# EAGLE board CANNode (EAGLE 7.4.0)
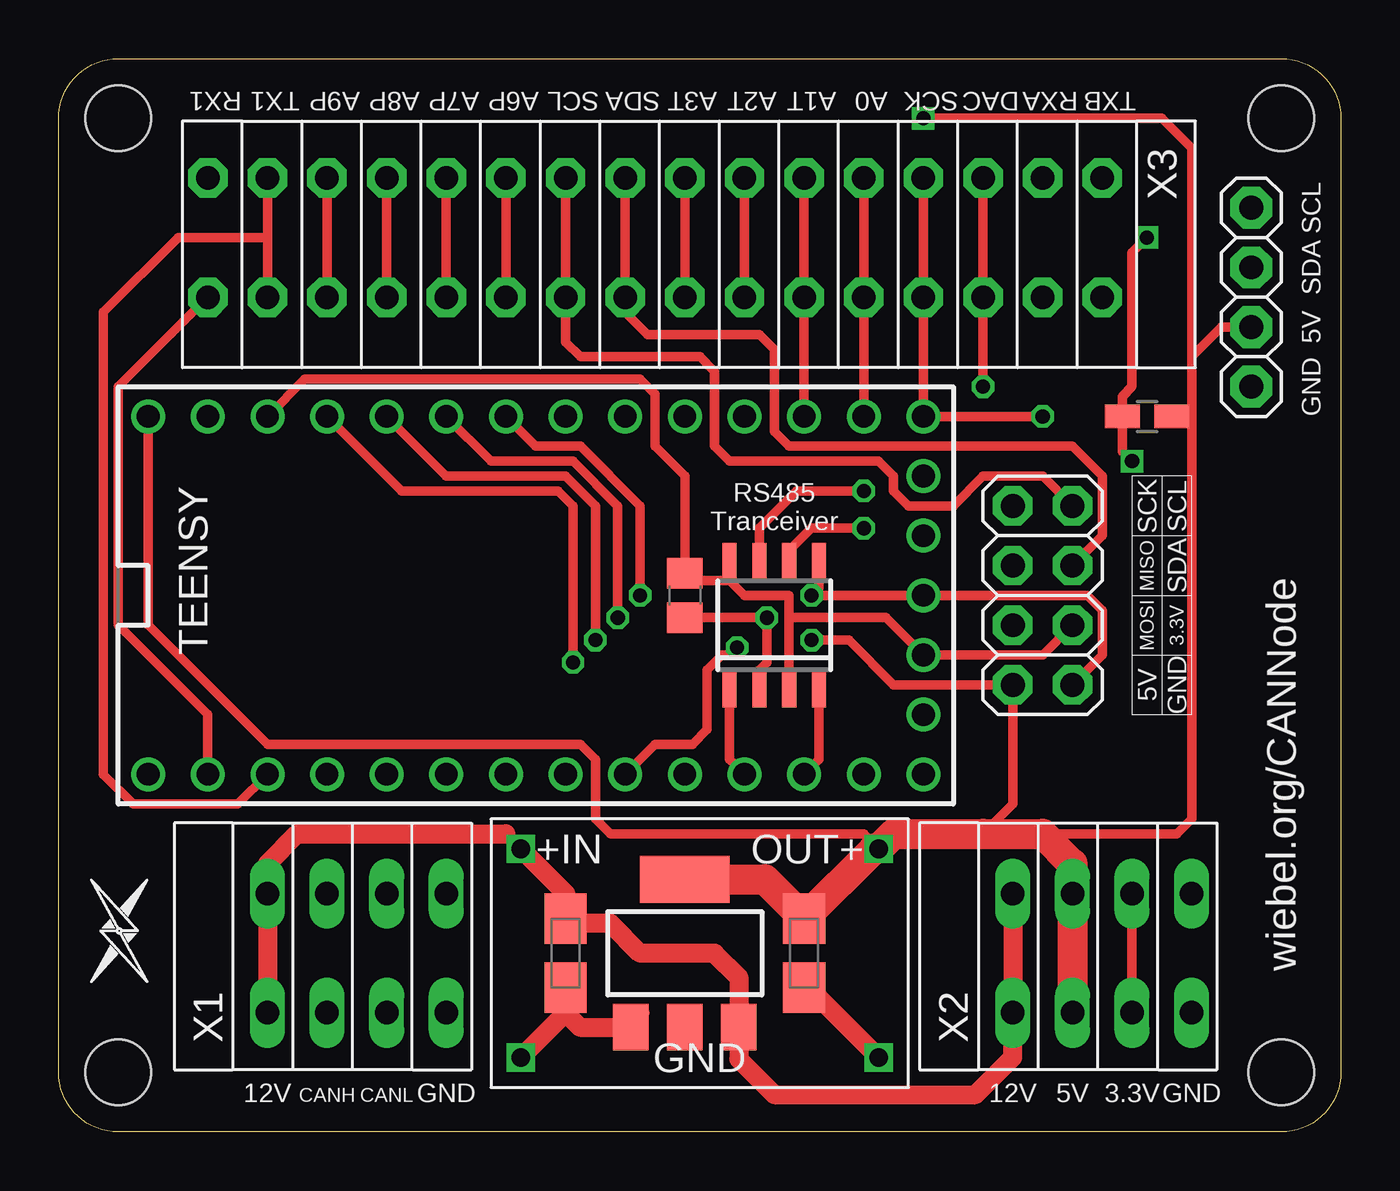
[diagram p0: board, top side]
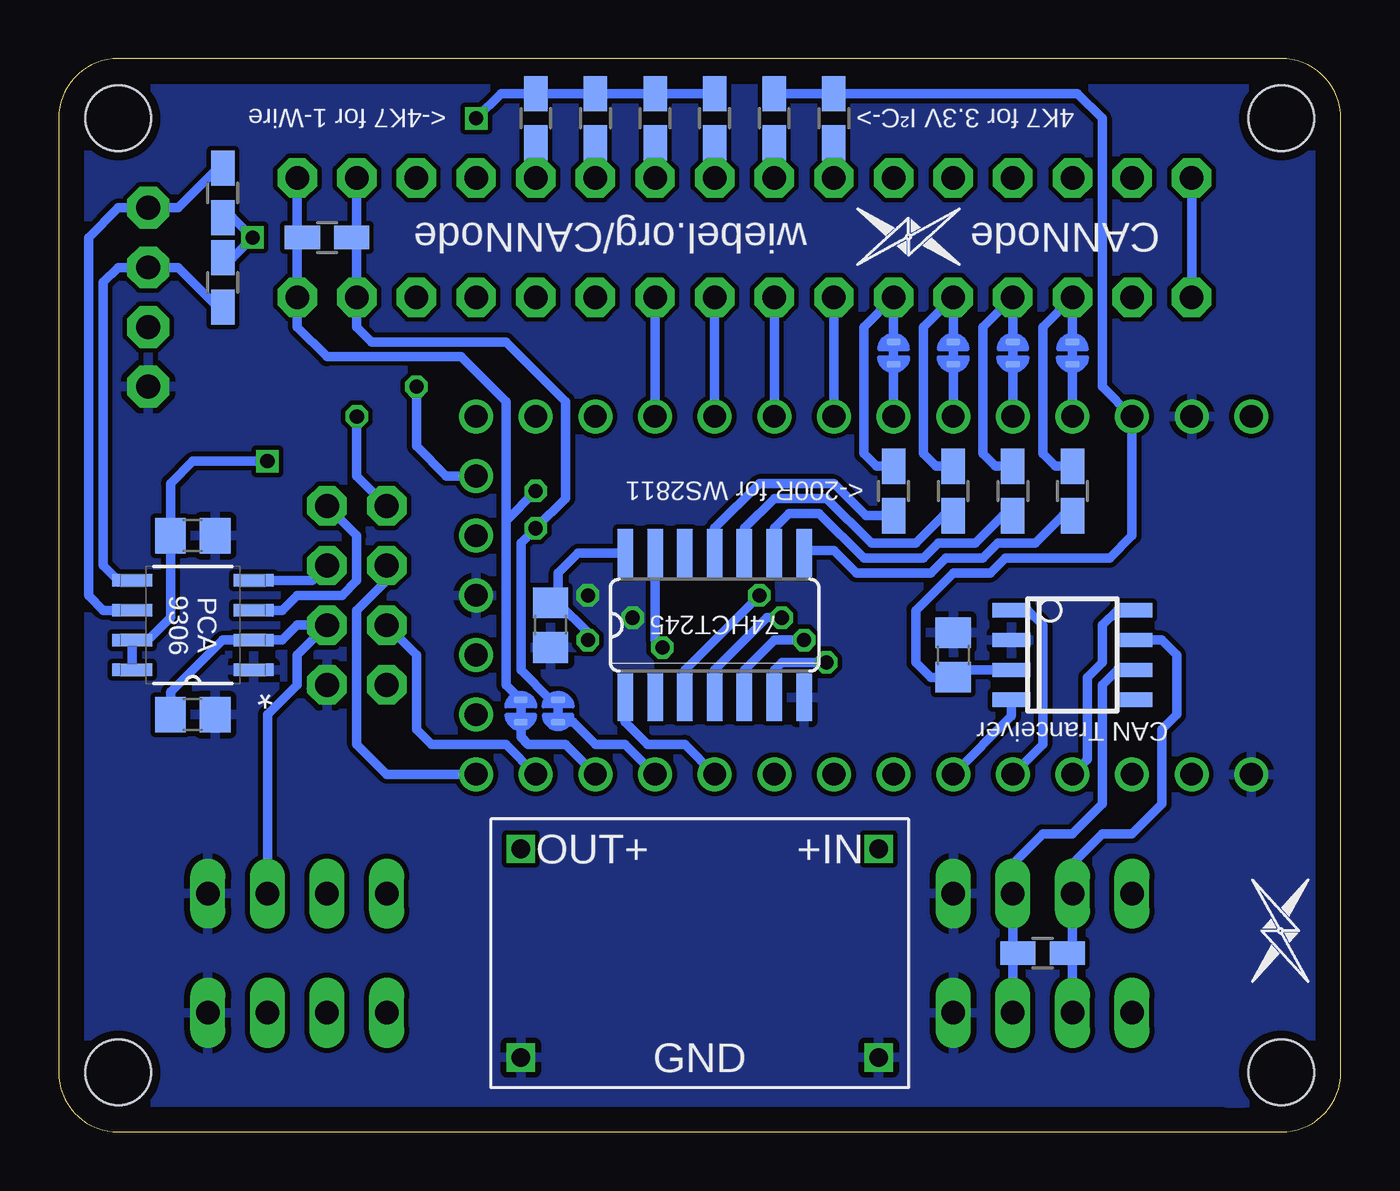
[diagram p1: board, bottom side, seen from below]

Size 54.61 x 45.72 mm. Coordinates in mm from the lower left corner, seen from the top.
Outline: 2.54,45.72 52.07,45.72 arc-90 54.61,43.18 54.61,2.54 arc-90 52.07,0 2.54,0 arc-90 0,2.54 0,43.18 arc-90 2.54,45.72
Copper layers (1*16): Top 0.0356mm / dielectric 1.5011mm / Bottom 0.0356mm
Design rules "oshpark-2layer *": minimum track width 6mil, minimum drill 13mil, track to track 6mil, track to pad 6mil, pad to pad 6mil, via to via 6mil, smd to smd 6mil, copper to edge 15mil, drill to drill 6mil, minimum pad ring 7mil, minimum via ring 7mil, stop-mask expansion 4mil, vias tented up to drill 0mil, thermal gap 10mil
Net classes: 0 default: clearance 0.205 mm
Holes 2.8 mm at 2.54,43.18 52.07,43.18 52.07,2.54 2.54,2.54

## Footprints (pad centres in the part's own frame; a part is rotated, then mirrored left to right if it is on the bottom)
C0805 = smd 1.3 x 1.5: 1 -0.95,0; 2 0.95,0
A/3216-18W = smd 2.15 x 1.8: + 1.475,0; - -1.475,0
SOT223 = smd 1.5 x 2: 1 -2.3,-3.15; 2 0,-3.15; 3 2.3,-3.15 | smd 3.8 x 2: 4 0,3.15
SO8 = smd 0.6 x 1.6: 1 -1.905,-2.6; 2 -0.635,-2.6; 3 0.635,-2.6; 4 1.905,-2.6; 5 1.905,2.6; 6 0.635,2.6; 7 -0.635,2.6; 8 -1.905,2.6
SO14 = smd 0.66 x 2.032: 1 -3.81,-3.073; 2 -2.54,-3.073; 3 -1.27,-3.073; 4 0,-3.073; 5 1.27,-3.073; 6 2.54,-3.073; 7 3.81,-3.073; 8 3.81,3.073; 9 2.54,3.073; 10 1.27,3.073; 11 0,3.073; 12 -1.27,3.073; 13 -2.54,3.073; 14 -3.81,3.073
D_R-PDSO-G8 = smd 0.6 x 1.5: 1 -1.905,-2.75; 2 -0.635,-2.75; 3 0.635,-2.75; 4 1.905,-2.75; 5 1.905,2.75; 6 0.635,2.75; 7 -0.635,2.75; 8 -1.905,2.75
2X04 = drill 1.016 pad 1.676 octagon: 1 -3.81,-1.27; 2 -3.81,1.27; 3 -1.27,-1.27; 4 -1.27,1.27; 5 1.27,-1.27; 6 1.27,1.27; 7 3.81,-1.27; 8 3.81,1.27
1X04 = drill 1.016 pad 1.778 octagon: 1 -3.81,0; 2 -1.27,0; 3 1.27,0; 4 3.81,0
DC-DC = drill 0.8 square: IN+ -15.875,9.525; IN- -15.875,0.635; OUT+ -0.635,9.525; OUT- -0.635,0.635
R0805W = smd 1.5 x 1: 1 -1.052,0; 2 1.052,0
TEENSY3-OUTER_ROW = drill 0.965: 0 -7.62,13.97; 1 -7.62,11.43; 2 -7.62,8.89; 3 -7.62,6.35; 3.3V 7.62,11.43; 3.3V1 -2.54,-16.51; 4 -7.62,3.81; 5 -7.62,1.27; 6 -7.62,-1.27; 7 -7.62,-3.81; 8 -7.62,-6.35; 9 -7.62,-8.89; 10 -7.62,-11.43; 11 -7.62,-13.97; 12 -7.62,-16.51; 13 7.62,-16.51; 14/A0 7.62,-13.97; 15/A1 7.62,-11.43; 16/A2 7.62,-8.89; 17/A3 7.62,-6.35; 18/A4 7.62,-3.81; 19/A5 7.62,-1.27; 20/A6 7.62,1.27; 21/A7 7.62,3.81; 22/A8 7.62,6.35; 23/A9 7.62,8.89; AGND 7.62,13.97; GND -7.62,16.51; GND1 0,-16.51; PGM 2.54,-16.51; RESET/DAC 5.08,-16.51; VBAT -5.08,-16.51; VIN 7.62,16.51
SOIC127P600X175-8N = smd 1.702 x 0.533: 1 -2.591,1.905; 2 -2.591,0.635; 3 -2.591,-0.635; 4 -2.591,-1.905; 5 2.591,-1.905; 6 2.591,-0.635; 7 2.591,0.635; 8 2.591,1.905
2-WAY_BRIDGE = smd 0.61 x 0.305: A 0,0.953; B 0,0
KF141V-P4 = drill 1 long: P$101 -7.62,0; P$102 -5.08,0; P$103 -2.54,0; P$104 0,0; P$201 -7.62,5.08; P$202 -5.08,5.08; P$203 -2.54,5.08; P$204 0,5.08
KF141V-P16 = drill 1 pad 1.676 octagon: P$101 -38.1,0; P$102 -35.56,0; P$103 -33.02,0; P$104 -30.48,0; P$105 -27.94,0; P$106 -25.4,0; P$107 -22.86,0; P$108 -20.32,0; P$109 -17.78,0; P$110 -15.24,0; P$111 -12.7,0; P$112 -10.16,0; P$113 -7.62,0; P$114 -5.08,0; P$115 -2.54,0; P$116 0,0; P$201 -38.1,5.08; P$202 -35.56,5.08; P$203 -33.02,5.08; P$204 -30.48,5.08; P$205 -27.94,5.08; P$206 -25.4,5.08; P$207 -22.86,5.08; P$208 -20.32,5.08; P$209 -17.78,5.08; P$210 -15.24,5.08; P$211 -12.7,5.08; P$212 -10.16,5.08; P$213 -7.62,5.08; P$214 -5.08,5.08; P$215 -2.54,5.08; P$216 0,5.08

## Placement (x,y rotation side)
C1  100n  [C0805]  16.51,20.32 270 bottom
C2  [A/3216-18W]  21.59,7.62 90 top
C3  [A/3216-18W]  31.75,7.62 90 top
C4  100n  [C0805]  33.66,21.59 90 bottom
C5  100n  [C0805]  48.9,25.4 180 bottom
C6  100n  [C0805]  48.9,17.78 180 bottom
C7  100n  [C0805]  26.67,22.86 90 top
IC1  LM117  [SOT223]  26.67,7.62 0 top
IC2  PCA82C250T  [SO8]  11.43,20.32 270 bottom
IC3  74HCT243D  [SO14]  26.67,21.59 0 bottom
IC4  75176AD  [D_R-PDSO-G8]  30.48,21.59 0 top
JP1  [2X04]  41.91,22.86 90 top
JP3  [1X04]  50.8,35.56 90 top
MOD1  DCDC  [DC-DC]  35.56,2.54 0 top
R1  [R0805W]  12.7,7.62 0 bottom
R2  200k  [R0805W]  46.35,30.48 0 top
R3  [R0805W]  47.62,36.2 90 bottom
R4  [R0805W]  47.62,40.01 270 bottom
R5  [R0805W]  43.18,38.1 0 bottom
R6  [R0805W]  34.29,43.18 270 bottom
R7  [R0805W]  31.75,43.18 270 bottom
R8  [R0805W]  29.21,43.18 270 bottom
R9  [R0805W]  26.67,43.18 270 bottom
R10  [R0805W]  11.43,27.3 270 bottom
R11  [R0805W]  13.97,27.3 270 bottom
R12  [R0805W]  16.51,27.3 270 bottom
R13  [R0805W]  19.05,27.3 270 bottom
R14  [R0805W]  24.13,43.18 90 bottom
R15  [R0805W]  21.59,43.18 90 bottom
TEENSY  TEENSY_3.1_OUTER_ROW  [TEENSY3-OUTER_ROW]  20.32,22.86 90 top
U1  PCA9306D,118  [SOIC127P600X175-8N]  48.9,21.59 180 bottom
U$1  [LOGO_MID]  3.81,6.35 90 top
U$2  2-WAY_BRIDGE  [2-WAY_BRIDGE]  19.05,33.66 180 bottom
U$3  2-WAY_BRIDGE  [2-WAY_BRIDGE]  16.51,33.66 180 bottom
U$4  2-WAY_BRIDGE  [2-WAY_BRIDGE]  13.97,33.66 180 bottom
U$5  2-WAY_BRIDGE  [2-WAY_BRIDGE]  11.43,33.66 180 bottom
U$6  [LOGO_MID]  16.19,39.37 180 bottom
U$7  [LOGO_MID]  3.81,10.79 270 bottom
U$14  2-WAY_BRIDGE  [2-WAY_BRIDGE]  34.92,17.46 0 bottom
U$15  2-WAY_BRIDGE  [2-WAY_BRIDGE]  33.34,17.46 0 bottom
X1  KF141-P4  [KF141V-P4]  16.51,5.08 0 top
X2  KF141-P4  [KF141V-P4]  48.26,5.08 0 top
X3  KF141-P16  [KF141V-P16]  6.35,40.64 180 top

## Library data of the parts
C1-C7 R10 = rcl
IC1 = v-reg
IC2 = micro-philips_own; OC_FARNELL: 1085275; OC_NEWARK: unknown
IC3 = 74xx-eu
IC4 = 751xx
JP1 = adafruit
JP3 = own_pinhead
MOD1 U$1-U$7 U$14 U$15 X1 X2 = own
R1-R9 R11-R15 = resistor
TEENSY = Teensy_3_and_LC_Series_Boards_v1.0
U1 = PCA9306D_118; MPN: PCA9306D,118; OC_FARNELL: 1831194; OC_NEWARK: 70R6428; PACKAGE: SOIC-8; SUPPLIER: NXP
X3 = own_002

## Nets
+3V3: C1.2 C6.2 C7.2 IC2.3 IC4.3 IC4.8 JP1.3 R14.2 R15.2 TEENSY.3.3V TEENSY.3.3V1 U1.2 X2.P$103 X2.P$203
+5V: C3.+ C4.2 IC1.4 IC3.14 JP1.2 JP3.2 MOD1.OUT+ R2.2 R6.1 R7.1 R8.1 R9.1 TEENSY.VIN X2.P$102 X2.P$202
+12V: C2.+ IC1.3 MOD1.IN+ X1.P$101 X1.P$201 X2.P$101 X2.P$201
A14: TEENSY.RESET/DAC X3.P$103 X3.P$203
GND: C1.1 C2.- C3.- C4.1 C5.1 C6.1 C7.1 IC1.1 IC2.2 IC3.7 IC4.2 IC4.5 JP1.1 JP3.1 MOD1.IN- MOD1.OUT- TEENSY.AGND TEENSY.GND TEENSY.GND1 U1.1 X1.P$104 X1.P$204 X2.P$104 X2.P$204
MISO: JP1.6 TEENSY.12
MOSI: JP1.4 TEENSY.11
N$1: IC2.1 TEENSY.3
N$2: IC2.4 TEENSY.4
N$3: IC2.7 R1.2 X1.P$102 X1.P$202
N$4: IC3.8 R10.2
N$5: IC3.9 R11.2
N$6: R12.1 U$3.B X3.P$112 X3.P$212
N$9: IC3.3 R13.1 TEENSY.20/A6 U$2.A U$2.B X3.P$111 X3.P$211
N$10: IC3.10 R12.2
N$11: IC2.8 TEENSY.2
N$12: C5.2 R2.1 R3.2 R4.2 U1.7 U1.8
N$13: R9.2 TEENSY.17/A3 X3.P$108 X3.P$208
N$14: R8.2 TEENSY.16/A2 X3.P$107 X3.P$207
N$15: R7.2 TEENSY.15/A1 X3.P$106 X3.P$206
N$16: R6.2 TEENSY.14/A0 X3.P$105 X3.P$205
N$17: R10.1 U$5.B X3.P$114 X3.P$214
N$18: IC3.5 R11.1 TEENSY.22/A8 U$4.A U$4.B X3.P$113 X3.P$213
N$19: IC3.4 TEENSY.21/A7 U$3.A
N$20: IC2.6 R1.1 X1.P$103 X1.P$203
N$21: IC3.11 R13.2
N$25: IC3.6 TEENSY.23/A9 U$5.A
RX1: TEENSY.0 X3.P$116 X3.P$216
RX2: IC4.1 IC4.6 R5.2 TEENSY.9 U$15.A U$15.B X3.P$102 X3.P$202
RX3: IC3.13 TEENSY.7
SCK: JP1.8 TEENSY.13 X3.P$104 X3.P$204
SCL0: JP1.7 R15.1 TEENSY.19/A5 U1.3 X3.P$110 X3.P$210
SCL_5V: JP3.4 R4.1 U1.6
SDA0: JP1.5 R14.1 TEENSY.18/A4 U1.4 X3.P$109 X3.P$209
SDA_5V: JP3.3 R3.1 U1.5
TX1: TEENSY.1 X3.P$115 X3.P$215
TX2: IC4.4 IC4.7 R5.1 TEENSY.10 U$14.A U$14.B X3.P$101 X3.P$201
TX3: IC3.1 TEENSY.8
VBAT: TEENSY.VBAT

## Tracks (layer width: path | path; a pad name or v marks a point on that pad's centre or on a via)
+3V3
  Top 0.406: X2.P$103 X2.P$203 45.72,11.43 | 31.11,21.91 35.24,21.91 TEENSY.3.3V1 41.91,20.32 JP1.3 | 28.57,23.5 IC4.8 | IC4.3 31.11,21.91 | 31.11,21.91 31.11,22.86 29.21,22.86 28.57,23.5 | 28.57,23.5 26.98,23.5 C7.2 26.67,27.94 25.4,29.21 25.4,31.43 24.77,32.07 10.48,32.07 TEENSY.3.3V
  Bottom 0.406: IC2.3 16.2,19.68 C1.2 17.46,19.37 17.47,19.37 18.1,20 18.1,22.23 16.51,23.81 14.92,23.81 14.29,24.45 9.84,24.45 8.89,25.4 TEENSY.3.3V 10.16,31.75 10.16,43.18 11.21,44.23 R15.2 R14.2 | X2.P$203 45.72,17.78 44.45,19.05 44.45,20.32 JP1.3 44.45,21.59 45.09,20.95 U1.2 47.62,20.95 49.84,18.73 C6.2
+5V  (via drill 0.6)
  Top 0.406: TEENSY.VIN 3.81,21.59 8.89,16.51 22.23,16.51 22.86,15.88 22.86,13.34 23.5,12.7 34.29,12.7 MOD1.OUT+ | X2.P$102 X2.P$202 43.18,11.43 | C3.+ 31.95,9.1 | JP3.2 49.53,34.29 48.26,33.02 | 48.26,33.02 48.26,30.48 | 48.26,30.48 48.26,13.34 47.62,12.7 41.91,12.7 | R2.2 48.26,30.48 | 39.37,12.7 40.64,13.97 JP1.2 35.56,19.05 33.66,20.95 v32.07,20.95 | 48.26,33.02 48.26,41.91 46.99,43.18 v36.83,43.18
  Top 0.813: MOD1.OUT+ 34.72,12.06
  Top 1.27: IC1.4 30.07,10.77 C3.+ 34.72,12.06 | MOD1.OUT+ 35.56,12.7 39.37,12.7 41.91,12.7 43.18,11.43 X2.P$102
  Bottom 0.406: 30.9,24.66 IC3.14 32.49,24.66 33.34,23.82 33.34,22.54 | C4.2 33.34,22.54 | 33.34,22.54 32.07,21.27 v32.07,20.95 | 26.89,44.45 R9.1 R8.1 R7.1 R6.1 35.78,44.23 v36.83,43.18
+12V
  Top 0.406: 21.59,10.16 C2.+ | X1.P$201 8.89,11.43 | IC1.3 28.97,4.05 | 19.05,12.7 MOD1.IN+
  Top 0.813: X1.P$201 X1.P$101 | MOD1.IN+ 21.59,10.16 | IC1.3 28.97,6.59 27.94,7.62 24.77,7.62 23.5,8.89 21.8,8.89 C2.+ | X2.P$201 X2.P$101 40.64,3.17 39.05,1.59 30.48,1.59 28.97,3.1 28.97,4.05 | 8.89,11.43 10.16,12.7 19.05,12.7
A14  (via drill 0.6)
  Top 0.406: X3.P$103 X3.P$203 v39.37,31.75
  Bottom 0.406: TEENSY.RESET/DAC 38.1,27.94 39.37,29.21 v39.37,31.75
GND  (via drill 0.6)
  Top 0.406: 21.59,5.08 C2.- | IC1.1 24.98,5.08 | C3.- 31.95,6.14 | IC4.5 32.38,23.18 v32.07,22.86 TEENSY.GND1 43.81,22.86 44.45,22.23 44.45,20.32 JP1.1 | IC4.2 29.84,19.68 30.16,20 v30.16,21.91 C7.1
  Top 0.813: MOD1.IN- 21.59,5.08 22.2,4.47 IC1.1 | 31.95,6.14 MOD1.OUT-
  pour Bottom: 3.81,44.45 50.8,44.45 arc-90 53.34,41.91 53.34,3.81 arc-90 52.07,1.27 5.08,1.27 arc-90 1.27,3.81 1.27,41.91 arc-90
MISO
  Bottom 0.406: TEENSY.12 40.64,15.24 41.91,16.51 41.91,22.23 40.64,23.5 JP1.6
MOSI
  Bottom 0.406: TEENSY.11 35.56,16.51 38.73,16.51 39.37,17.14 39.37,20.32 JP1.4
N$1
  Bottom 0.406: IC2.1 13.34,22.23 12.7,21.59 12.7,16.51 TEENSY.3
N$2
  Bottom 0.406: IC2.4 14.03,17.72 TEENSY.4
N$3
  Bottom 0.406: 11.43,7.62 X1.P$202 11.43,11.43 10.16,12.7 8.89,12.7 7.62,13.97 7.62,17.14 6.99,17.78 6.99,20.32 7.62,20.95 IC2.7 | 11.43,7.62 X1.P$102 | R1.2 11.43,7.62
N$4
  Bottom 0.406: IC3.8 22.76,24.77 21.59,24.77 20.64,23.81 17.46,23.81 16.83,24.45 15.24,24.45 14.61,25.08 13.02,25.08 11.85,26.25 R10.2
N$5
  Bottom 0.406: IC3.9 24.13,25.72 23.5,26.35 22.23,26.35 20.32,24.45 17.78,24.45 17.14,25.08 15.56,25.08 14.39,26.25 R11.2
N$6
  Top 0.406: X3.P$212 X3.P$112
  Bottom 0.406: 16.51,31.75 U$3.B X3.P$212 17.78,34.29 17.78,28.89 17.25,28.36 R12.1
N$9  (via drill 0.6)
  Top 0.406: X3.P$211 X3.P$111 | TEENSY.20/A6 20.32,29.21 22.23,29.21 24.77,26.67 v24.77,22.86
  Bottom 0.406: 27.94,18.41 IC3.3 27.94,19.68 v24.77,22.86 | TEENSY.20/A6 U$2.A U$2.B X3.P$211 20.32,34.29 20.32,28.89 19.79,28.36 R13.1
N$10
  Bottom 0.406: IC3.10 25.4,25.72 24.13,26.99 21.91,26.99 20,25.08 18.1,25.08 16.93,26.25 R12.2
N$11
  Bottom 0.406: IC2.8 9.53,22.23 10.16,21.59 10.16,20 10.79,19.37 10.79,15.88 TEENSY.2
N$12  (via drill 0.6)
  Top 0.406: v45.72,28.57 45.3,28.99 R2.1 45.3,31.33 45.72,31.75 45.72,37.47 v46.35,38.1
  Bottom 0.406: U1.8 U1.7 50.8,20.95 49.84,21.91 C5.2 49.84,27.62 48.9,28.57 v45.72,28.57 | R4.2 47.21,38.95 v46.35,38.1 47.21,37.25 R3.2
N$13
  Top 0.406: X3.P$108 X3.P$208
  Bottom 0.406: R9.2 X3.P$108 | X3.P$208 TEENSY.17/A3
N$14
  Top 0.406: X3.P$107 X3.P$207
  Bottom 0.406: R8.2 X3.P$107 | X3.P$207 TEENSY.16/A2
N$15
  Top 0.406: X3.P$106 X3.P$206 TEENSY.15/A1
  Bottom 0.406: R7.2 X3.P$106
N$16
  Top 0.406: X3.P$105 X3.P$205 TEENSY.14/A0
  Bottom 0.406: X3.P$105 R6.2
N$17
  Top 0.406: X3.P$214 X3.P$114
  Bottom 0.406: 11.43,31.75 U$5.B X3.P$214 12.7,34.29 12.7,28.89 12.16,28.36 R10.1
N$18  (via drill 0.6)
  Top 0.406: X3.P$113 X3.P$213 | v22.86,20.95 22.86,26.67 21.59,27.94 16.51,27.94 TEENSY.22/A8
  Bottom 0.406: 25.4,18.41 IC3.5 25.4,19.68 24.13,20.95 v22.86,20.95 | TEENSY.22/A8 U$4.A U$4.B X3.P$213 15.24,34.29 15.24,28.89 14.71,28.36 R11.1
N$19  (via drill 0.6)
  Top 0.406: v23.81,21.91 23.81,26.67 21.91,28.57 18.41,28.57 TEENSY.21/A7
  Bottom 0.406: 26.67,18.41 IC3.4 26.67,19.68 24.45,21.91 v23.81,21.91 | TEENSY.21/A7 U$3.A
N$20
  Bottom 0.406: 13.97,7.84 R1.1 | 13.97,7.84 X1.P$203 13.97,11.43 12.7,12.7 11.43,12.7 10.16,13.97 10.16,19.05 9.53,19.68 IC2.6 | 13.97,7.84 X1.P$103
N$21
  Bottom 0.406: IC3.11 26.67,25.72 24.77,27.62 21.59,27.62 20.22,26.25 R13.2 19.15,26.35
N$25  (via drill 0.6)
  Top 0.406: v21.91,20 21.91,26.67 21.27,27.3 14.61,27.3 TEENSY.23/A9
  Bottom 0.406: 24.13,18.41 IC3.6 24.13,19.68 23.81,20 v21.91,20 | TEENSY.23/A9 U$5.A
RX1
  Top 0.406: TEENSY.0 6.35,17.78 2.54,21.59 2.54,31.75 X3.P$216
  Bottom 0.406: X3.P$216 X3.P$116
RX2  (via drill 0.6)
  Top 0.406: IC4.1 28.57,15.88 TEENSY.9 | IC4.6 31.11,24.77 32.07,25.72 v34.29,25.72
  Bottom 0.406: X3.P$102 41.91,38.1 | 41.91,38.1 X3.P$202 41.91,34.29 41.27,33.66 35.56,33.66 33.02,31.11 33.02,26.99 v34.29,25.72 34.92,25.08 34.92,19.68 33.66,18.41 U$15.A U$15.B 32.7,17.46 31.75,16.51 30.48,16.51 TEENSY.9 | R5.2 41.91,38.1
RX3  (via drill 0.6)
  Top 0.406: 28.84,20.64 v28.89,20.64 28.57,20.32 28.26,20.32 27.62,19.68 27.62,17.14 26.99,16.51 25.4,16.51 TEENSY.7
  Bottom 0.406: IC3.13 29.21,20.95 v28.89,20.64
SCK  (via drill 0.6)
  Top 0.406: v41.91,30.48 TEENSY.13 X3.P$204 X3.P$104
  Bottom 0.406: v41.91,30.48 41.91,27.94 JP1.8
SCL0
  Top 0.406: JP1.7 41.91,27.94 39.37,27.94 38.1,26.67 36.2,26.67 35.56,27.3 35.56,27.94 34.92,28.57 28.57,28.57 27.94,29.21 27.94,32.38 27.3,33.02 22.23,33.02 21.59,33.66 X3.P$210 X3.P$110
  Bottom 0.406: U1.3 45.09,22.23 44.45,22.86 42.55,22.86 41.91,23.5 41.91,25.4 JP1.7 | TEENSY.19/A5 X3.P$210 | X3.P$110 R15.1
SCL_5V
  Bottom 0.406: R4.1 47.84,41.06 49.53,39.37 JP3.4 52.07,39.37 53.34,38.1 53.34,22.86 52.7,22.23 U1.6
SDA0
  Top 0.406: JP1.5 44.45,25.4 44.45,27.94 43.18,29.21 31.11,29.21 30.48,29.84 30.48,33.34 29.84,33.97 25.08,33.97 24.13,34.92 X3.P$209 X3.P$109
  Bottom 0.406: U1.4 43.81,23.5 JP1.5 | TEENSY.18/A4 X3.P$209 | X3.P$109 R14.1
SDA_5V
  Bottom 0.406: R3.1 47.84,35.14 49.53,36.83 JP3.3 52.07,36.83 52.7,36.2 52.7,24.13 52.07,23.5 U1.5
TX1
  Top 0.406: TEENSY.1 7.62,13.97 3.17,13.97 1.91,15.24 1.91,34.92 5.08,38.1 8.89,38.1 | 8.89,36.83 X3.P$215 8.89,38.1 | X3.P$115 8.89,38.1
TX2  (via drill 0.6)
  Top 0.406: IC4.4 32.38,15.88 TEENSY.10 | IC4.7 29.84,25.72 31.43,27.3 v34.29,27.3
  Bottom 0.406: TEENSY.10 33.02,16.51 34.61,16.51 34.92,16.83 U$14.B U$14.A 35.56,19.05 35.56,26.04 | X3.P$201 X3.P$101 44.45,38.1 | X3.P$201 44.45,34.29 43.18,33.02 37.47,33.02 35.56,31.11 35.56,26.04 | X3.P$201 44.45,38.1 | R5.1 44.45,38.1 | v34.29,27.3 35.56,26.04
TX3
  Bottom 0.406: TEENSY.8 27.94,16.51 29.53,16.51 30.48,17.46 IC3.1

## Text on the board
tPlace: RX1 | TX1 | A9P | A8P | A7P | A6P | SCL | SDA | A3T | A2T | A1T | A0 | SCK | DAC | RXA | TXB | SCL | SDA | 5V | GND | SCK | SCL | RS485 / Tranceiver | MISO | SDA | MOSI | 3.3V | 5V | GND | wiebel.org/CANNode | 12V | CANH | CANL | GND | 12V | 5V | 3.3V | GND
bPlace: 4K7 for 3.3V I²C-> | <-4K7 for 1-Wire | CANNode | wiebel.org/CANNode | <-200R for WS2811 | 74HCT245 | PCA / 9306 | PCA / 9306 | CAN Tranceiver